# EAGLE board Proiect TSC v45 (EAGLE 9.7.0), part 1 of 2
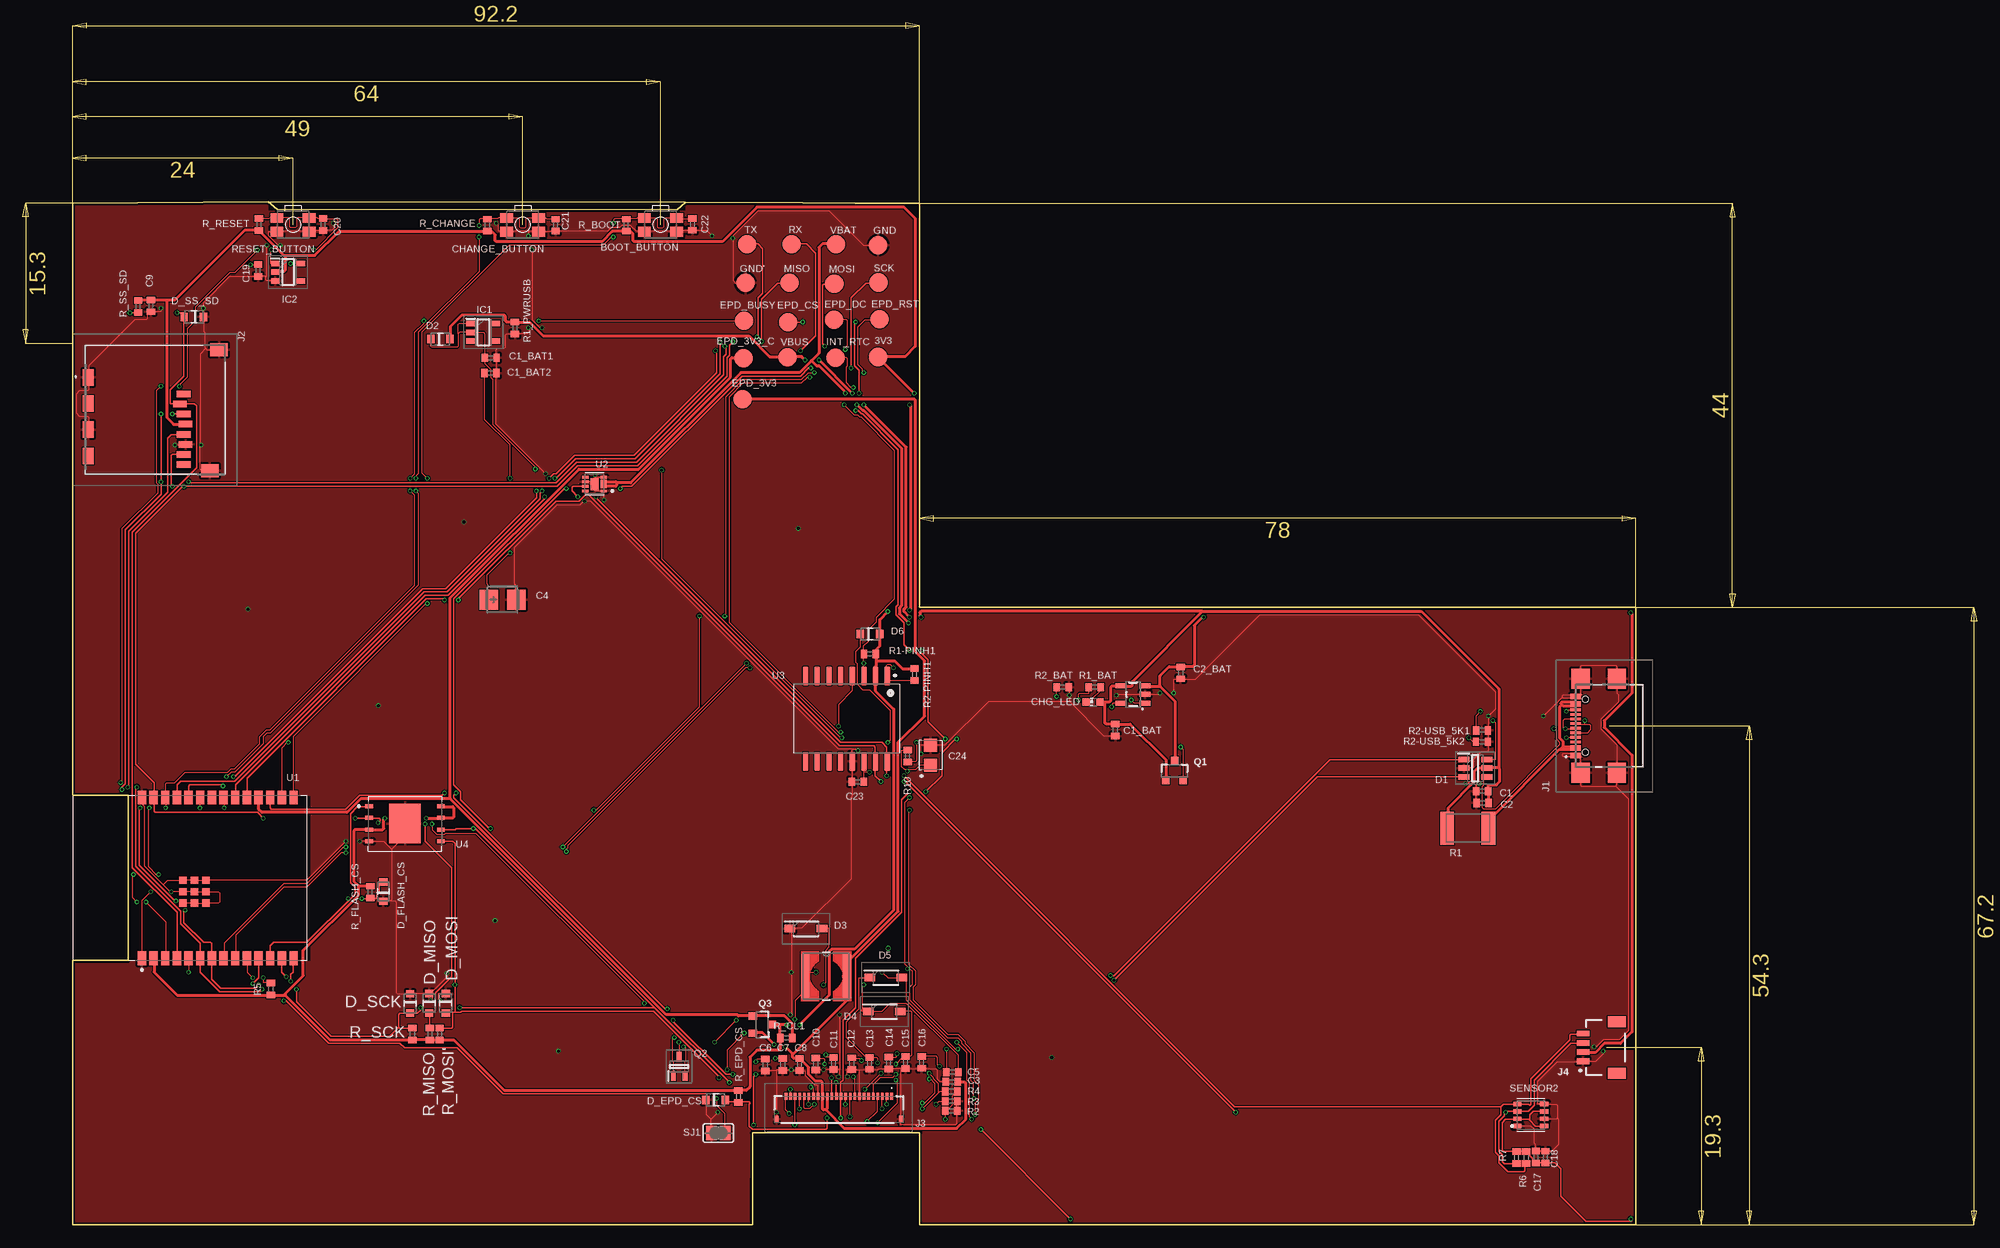
[diagram p0: board, top side]
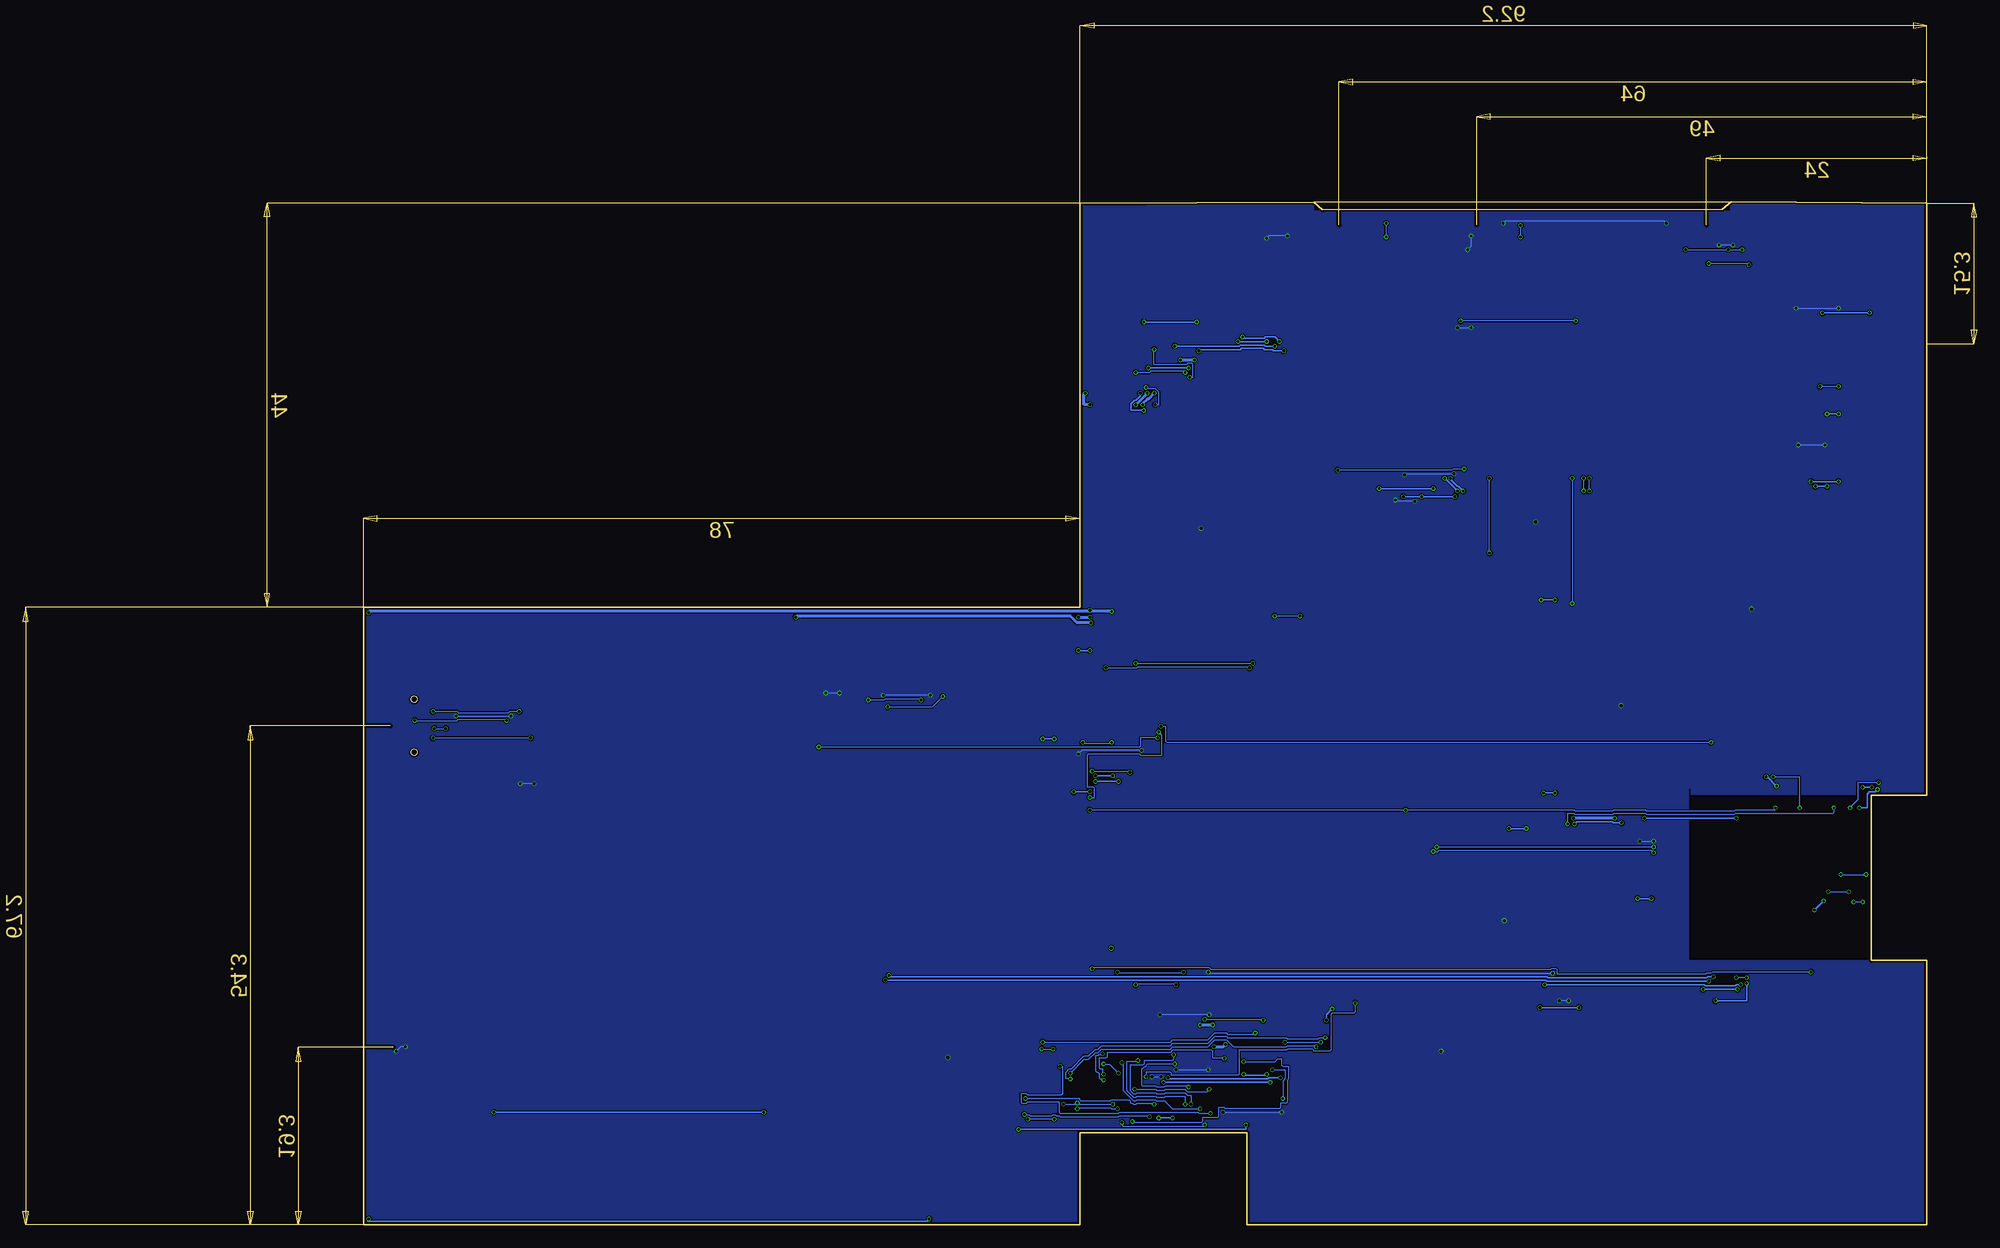
[diagram p1: board, bottom side, seen from below]

Size 212.67 x 130.8 mm. Coordinates in mm from the lower left corner, seen from the top.
Outline: 26.72,111.34 5.4,111.2 5.4,46.76 11.45,46.76 11.45,28.77 5.4,28.77 5.4,0 79.4,0 79.4,10 97.6,10 97.6,0 175.6,0 175.6,67.2 97.6,67.2 97.6,111.2 72.13,111.28
Outline: 26.72,111.34 72.13,111.28
Outline: 26.72,111.34 27.66,110.53 71.19,110.47 72.13,111.28
Copper layers (1*16): Top 0.035mm / dielectric 1.6mm / Bottom 0.035mm
Design rules "jlcpcb-2layers.edru *": minimum track width 5mil, minimum drill 0.3mm, track to track 5mil, track to pad 5mil, pad to pad 5mil, via to via 5mil, smd to smd 5mil, copper to edge 0.2mm, drill to drill 6mil, minimum pad ring 10mil, minimum via ring 3mil, stop-mask expansion 4mil, vias tented up to drill 0mil, thermal gap 10mil
Net classes: 1 power: width 0.3 mm; 2 data: width 0.15 mm

## Footprints (pad centres in the part's own frame; a part is rotated, then mirrored left to right if it is on the bottom)
TP20R = smd 2 x 2: TP 0,0
MYBUTTON = smd 1.4 x 1.05: 1 1.75,0.75; 2 -1.75,0.75; 3 -1.75,-0.75; 4 1.75,-0.75
EAGLE-LTSPICE_C0402 = smd 0.7 x 0.9: 1 -0.65,0; 2 0.65,0
RCL_CT3528 = smd 2 x 2.2: + -1.5,0; - 1.5,0
CAPCP3225X100N = smd 1.4 x 1.4: 1 -1.1,0; 2 1.1,0
ADAFRUIT_CHIP-LED0603 = smd 0.8 x 0.8: A 0,-0.75; C 0,0.75
SOT95P280X145-6N = smd 1.2 x 0.6: 1 -1.25,0.95; 2 -1.25,0; 3 -1.25,-0.95; 4 1.25,-0.95; 5 1.25,0; 6 1.25,0.95
ESP32_WROVER_AVX---SD0805S020S1R0_AVX_SD0805S020S1R0_0 = smd 0.8 x 0.9: 1 -1.05,0; 2 1.05,0
SOD3716X135N = smd 1.15 x 0.8: 1 -1.75,0; 2 1.75,0
SOT95P280X125-5N = smd 0.9 x 0.6: 1 -1.4,0.95; 2 -1.4,0; 3 -1.4,-0.95; 4 1.4,-0.95; 5 1.4,0.95
SAMACSYS_PARTS_USB4110GFA = smd 0.3 x 1.15: A1 -3.35,3.678; A4 -2.55,3.678; A5 -1.25,3.678; A6 -0.25,3.678; A7 0.25,3.678; A8 1.25,3.678; A9 2.55,3.678; A12 3.35,3.678; B1 3.05,3.678; B4 2.25,3.678; B5 1.75,3.678; B6 0.75,3.678; B7 -0.75,3.678; B8 -1.75,3.678; B9 -2.25,3.678; B12 -3.05,3.678 | smd 2.18 x 2: MP1 -5.11,-0.827; MP2 5.11,-0.827; MP3 -5.11,3.103; MP4 5.11,3.103 | hole 0.65: -2.89,2.603; 2.89,2.603
112ATAARR03ATTEND = smd 1.8 x 1.2: G1 10.6,10.4; G2 4.9,10.4; S1 7.75,10.4; S2 2.05,10.4 | smd 1.4 x 1.9: G3 13.6,-3.85; G4 0.45,-2.85 | smd 0.7 x 1.5: P1 8.8,0; P2 7.7,0.4; P3 6.6,0; P4 5.5,-0.2; P5 4.4,0; P6 3.3,-0.2; P7 2.2,0; P8 1.1,0
FH34SRJ24S05SH99 = smd 0.3 x 0.8: 1 5.75,1.45; 2 5.25,1.45; 3 4.75,1.45; 4 4.25,1.45; 5 3.75,1.45; 6 3.25,1.45; 7 2.75,1.45; 8 2.25,1.45; 9 1.75,1.45; 10 1.25,1.45; 11 0.75,1.45; 12 0.25,1.45; 13 -0.25,1.45; 14 -0.75,1.45; 15 -1.25,1.45; 16 -1.75,1.45; 17 -2.25,1.45; 18 -2.75,1.45; 19 -3.25,1.45; 20 -3.75,1.45; 21 -4.25,1.45; 22 -4.75,1.45; 23 -5.25,1.45; 24 -5.75,1.45 | smd 0.4 x 0.8: MP1 6.75,-1.05; MP2 -6.75,-1.05
JST04_1MM_RA = smd 0.6 x 1.35: 1 -1.5,0; 2 -0.5,0; 3 0.5,0; 4 1.5,0 | smd 1.2 x 2: NC1 2.8,-3.675; NC2 -2.8,-3.675
IND_4828-WE-TPC_WRE = smd 0.889 x 4.826: 1 -2.286,0; 2 2.286,0
ESP32_WROVER_SPARKFUN-IC-POWER_SOT23-5 = smd 0.55 x 1.2: 1 -0.95,-1.3; 2 0,-1.3; 3 0.95,-1.3; 4 0.95,1.3; 5 -0.95,1.3
ESP32_WROVER_SPARKFUN-DISCRETESEMI_SOT23-3 = smd 0.8 x 0.9: 1 -0.95,-1; 2 0.95,-1; 3 0,1.1
SOT65P210X110-3N = smd 1.05 x 0.5: 1 -1.05,0.65; 2 -1.05,-0.65; 3 1.05,0
ESP32C6_VARISTOR_CT/CN1812 = smd 1.5 x 3.6: 1 -2.25,0; 2 2.25,0
ESP32_WROVER_BME680_PSON80P300X300X100-8N = smd 1.016 x 0.5: 1 1.458,1.2; 2 1.458,0.4; 3 1.458,-0.4; 4 1.458,-1.2; 5 -1.458,-1.22; 6 -1.458,-0.4; 7 -1.458,0.4; 8 -1.458,1.2
SJ = smd 1.168 x 1.6: 1 -0.762,0; 2 0.762,0
XCVR_ESP32-C6-WROOM-1-N8 = smd 1.5 x 0.9: 1 -8.75,5.26; 2 -8.75,3.99; 3 -8.75,2.72; 4 -8.75,1.45; 5 -8.75,0.18; 6 -8.75,-1.09; 7 -8.75,-2.36; 8 -8.75,-3.63; 9 -8.75,-4.9; 10 -8.75,-6.17; 11 -8.75,-7.44; 12 -8.75,-8.71; 13 -8.75,-9.98; 14 -8.75,-11.25; 15 8.75,-11.25; 16 8.75,-9.98; 17 8.75,-8.71; 18 8.75,-7.44; 19 8.75,-6.17; 20 8.75,-4.9; 21 8.75,-3.63; 22 8.75,-2.36; 23 8.75,-1.09; 24 8.75,0.18; 25 8.75,1.45; 26 8.75,2.72; 27 8.75,3.99; 28 8.75,5.26 | smd 0.8 x 0.8: 29_1 -2.755,0.79; 29_2 -1.505,0.79; 29_3 -0.255,0.79; 29_4 -2.755,-0.46; 29_5 -1.505,-0.46; 29_6 -0.255,-0.46; 29_7 -2.755,-1.71; 29_8 -1.505,-1.71; 29_9 -0.255,-1.71
SON50P200X200X80-9N = smd 0.76 x 0.27: 1 -0.985,0.75; 4 -0.985,-0.75; 5 0.985,-0.75; 6 0.985,-0.25; 7 0.985,0.25; 8 0.985,0.75 | smd 0.76 x 0.397: 2 -0.985,0.25; 3 -0.985,-0.25 | smd 0.9 x 1.3: 9 0,0
SOIC127P1032X265-16N = smd 2.05 x 0.59: 1 -4.655,4.445; 2 -4.655,3.175; 3 -4.655,1.905; 4 -4.655,0.635; 5 -4.655,-0.635; 6 -4.655,-1.905; 7 -4.655,-3.175; 8 -4.655,-4.445; 9 4.655,-4.445; 10 4.655,-3.175; 11 4.655,-1.905; 12 4.655,-0.635; 13 4.655,0.635; 14 4.655,1.905; 15 4.655,3.175; 16 4.655,4.445
SON127P600X800X80-9N = smd 0.94 x 0.44: 1 -3.895,1.905; 2 -3.895,0.635; 3 -3.895,-0.635; 4 -3.895,-1.905; 5 3.895,-1.905; 6 3.895,-0.635; 7 3.895,0.635; 8 3.895,1.905 | smd 3.4 x 4.3: 9 0,0

## Placement (x,y rotation side)
3V3  TPTP20R  [TP20R]  93.08,94.45 0 top
BOOT_BUTTON  BUTTON_CUSYOMV1  [MYBUTTON]  69.4,108.83 180 top
C1  100nF  [EAGLE-LTSPICE_C0402]  158.85,47.18 180 top
C1_BAT  4.7uF  [EAGLE-LTSPICE_C0402]  118.91,53.84 270 top
C1_BAT1  4.7uF  [EAGLE-LTSPICE_C0402]  50.91,94.35 0 top
C1_BAT2  4.7uF  [EAGLE-LTSPICE_C0402]  50.9,92.7 0 top
C2  4.7uF  [EAGLE-LTSPICE_C0402]  158.88,45.91 180 top
C2_BAT  4.7uF  [EAGLE-LTSPICE_C0402]  126.03,60.08 270 top
C3  10uF  [EAGLE-LTSPICE_C0402]  101.09,15.56 180 top
C4  100uF  [RCL_CT3528]  52.21,68.04 0 top
C5  4.7uF/25V  [EAGLE-LTSPICE_C0402]  101.15,16.61 180 top
C6  1uF/50V  [EAGLE-LTSPICE_C0402]  80.81,17.4 90 top
C7  1uF/50V  [EAGLE-LTSPICE_C0402]  82.71,17.46 90 top
C8  1uF/50V  [EAGLE-LTSPICE_C0402]  84.55,17.45 90 top
C9  100nF  [EAGLE-LTSPICE_C0402]  13.93,100.02 270 top
C10  1uF/50V  [EAGLE-LTSPICE_C0402]  86.31,17.51 90 top
C11  1uF/50V  [EAGLE-LTSPICE_C0402]  88.23,17.57 90 top
C12  1uF/50V  [EAGLE-LTSPICE_C0402]  90.22,17.53 90 top
C13  1uF/50V  [EAGLE-LTSPICE_C0402]  92.15,17.58 90 top
C14  1uF/50V  [EAGLE-LTSPICE_C0402]  94.24,17.59 90 top
C15  1uF/50V  [EAGLE-LTSPICE_C0402]  96.07,17.68 90 top
C16  1uF/50V  [EAGLE-LTSPICE_C0402]  97.84,17.69 90 top
C17  100nF  [EAGLE-LTSPICE_C0402]  164.69,7.36 90 top
C18  100nF  [EAGLE-LTSPICE_C0402]  165.74,7.36 90 top
C19  100nF  [EAGLE-LTSPICE_C0402]  25.61,103.86 270 top
C20  1uF  [EAGLE-LTSPICE_C0402]  32.67,108.86 270 top
C21  100uF  [EAGLE-LTSPICE_C0402]  57.99,108.79 270 top
C22  100uF  [EAGLE-LTSPICE_C0402]  72.88,108.89 270 top
C23  100nF  [EAGLE-LTSPICE_C0402]  90.89,48.22 180 top
C24  CPH3225A  [CAPCP3225X100N]  98.81,51.11 90 top
CHANGE_BUTTON  BUTTON_CUSYOMV1  [MYBUTTON]  54.4,108.83 180 top
CHG_LED  [ADAFRUIT_CHIP-LED0603]  116.5,56.91 90 top
D1  USBLC6-2SC6Y  [SOT95P280X145-6N]  158.09,49.7 0 top
D2  ESP32_WROVER_AVX---SD0805S020S1R0_AVX_SD0805S020S1R0_0_0AVX_SD0805S020S1R0_0_0  [ESP32_WROVER_AVX---SD0805S020S1R0_AVX_SD0805S020S1R0_0]  45.44,96.4 0 top
D3  MBR0530  [SOD3716X135N]  85.24,32.23 0 top
D4  MBR0530  [SOD3716X135N]  93.76,23.2 0 top
D5  MBR0530  [SOD3716X135N]  93.93,26.9 0 top
D6  ESP32_WROVER_AVX---SD0805S020S1R0_AVX_SD0805S020S1R0_0_0AVX_SD0805S020S1R0_0_0  [ESP32_WROVER_AVX---SD0805S020S1R0_AVX_SD0805S020S1R0_0]  92.21,64.3 0 top
D_EPD_CS  PGB1010603MR  [ESP32_WROVER_AVX---SD0805S020S1R0_AVX_SD0805S020S1R0_0]  75.4,13.59 0 top
D_FLASH_CS  PGB1010603MR  [ESP32_WROVER_AVX---SD0805S020S1R0_AVX_SD0805S020S1R0_0]  39.23,36.26 90 top
D_MISO  PGB1010603MR  [ESP32_WROVER_AVX---SD0805S020S1R0_AVX_SD0805S020S1R0_0]  44.23,24.12 270 top
D_MOSI  PGB1010603MR  [ESP32_WROVER_AVX---SD0805S020S1R0_AVX_SD0805S020S1R0_0]  46.03,24.12 270 top
D_SCK  PGB1010603MR  [ESP32_WROVER_AVX---SD0805S020S1R0_AVX_SD0805S020S1R0_0]  42.14,24.09 270 top
D_SS_SD  PGB1010603MR  [ESP32_WROVER_AVX---SD0805S020S1R0_AVX_SD0805S020S1R0_0]  18.61,98.81 180 top
EPD_3V3  TPTP20R  [TP20R]  78.34,89.86 0 top
EPD_3V3_C  TPTP20R  [TP20R]  78.46,94.32 0 top
EPD_BUSY  TPTP20R  [TP20R]  78.52,98.39 0 top
EPD_CS  TPTP20R  [TP20R]  83.28,98.2 0 top
EPD_DC  TPTP20R  [TP20R]  88.32,98.47 0 top
EPD_RST  TPTP20R  [TP20R]  93.23,98.56 0 top
GND  TPTP20R  [TP20R]  93.11,106.61 0 top
GND'  TPTP20R  [TP20R]  78.65,102.53 0 top
IC1  XC6220A331MR-G  [SOT95P280X125-5N]  50.12,97.13 0 top
IC2  BD5229G-TR  [SOT95P280X125-5N]  28.85,103.69 0 top
INT_RTC  TPTP20R  [TP20R]  88.45,94.39 0 top
J1  SAMACSYS_PARTS_USB4110-GF-A  [SAMACSYS_PARTS_USB4110GFA]  172.68,54.3 90 top
J2  112A-TAAR-R03_ATTEND  [112ATAARR03ATTEND]  17.49,81.63 90 top
J3  FH34SRJ-24S-0.5SH_99_  [FH34SRJ24S05SH99]  88.81,12.54 0 top
J4  QWIIC_RIGHT_ANGLE  [JST04_1MM_RA]  169.83,19.3 90 top
L1  68Uh  [IND_4828-WE-TPC_WRE]  87.43,27.05 0 top
MCP73831  ESP32_WROVER_SPARKFUN-IC-POWER_MCP73831  [ESP32_WROVER_SPARKFUN-IC-POWER_SOT23-5]  120.85,57.73 90 top
MISO  TPTP20R  [TP20R]  83.46,102.51 0 top
MOSI  TPTP20R  [TP20R]  88.32,102.42 0 top
Q1  20V/4.2A/52mΩ/1.4W  [ESP32_WROVER_SPARKFUN-DISCRETESEMI_SOT23-3]  125.36,49.38 0 top
Q2  SI1308EDL-T1-GE3  [SOT65P210X110-3N]  71.43,17.24 90 top
Q3  20V/4.2A/52mΩ/1.4W  [ESP32_WROVER_SPARKFUN-DISCRETESEMI_SOT23-3]  80.44,21.79 270 top
R1  ESP32C6_VARISTORCN1812  [ESP32C6_VARISTOR_CT/CN1812]  157.29,43.16 180 top
R1-PINH1  10K  [EAGLE-LTSPICE_C0402]  92.21,62.13 0 top
R1_BAT  200  [EAGLE-LTSPICE_C0402]  116.66,58.51 180 top
R1_PWRUSB  100K  [EAGLE-LTSPICE_C0402]  53.56,97.61 90 top
R2  2.2  [EAGLE-LTSPICE_C0402]  101.05,12.4 180 top
R2-PINH1  10K  [EAGLE-LTSPICE_C0402]  97.06,59.91 90 top
R2-USB_5K1  5k1  [EAGLE-LTSPICE_C0402]  158.82,53.81 0 top
R2-USB_5K2  5k1  [EAGLE-LTSPICE_C0402]  158.82,52.57 180 top
R2_BAT  2K  [EAGLE-LTSPICE_C0402]  113.2,58.51 180 top
R3  10K  [EAGLE-LTSPICE_C0402]  101.08,13.46 180 top
R4  0.47  [EAGLE-LTSPICE_C0402]  101.07,14.51 180 top
R5  10K  [EAGLE-LTSPICE_C0402]  27,25.67 270 top
R6  10K  [EAGLE-LTSPICE_C0402]  163.64,7.33 90 top
R7  10K  [EAGLE-LTSPICE_C0402]  162.59,7.32 90 top
R10  15  [EAGLE-LTSPICE_C0402]  96.31,51.01 90 top
R_BOOT  10k  [EAGLE-LTSPICE_C0402]  65.67,108.79 270 top
R_CHANGE  10k  [EAGLE-LTSPICE_C0402]  50.56,108.79 270 top
R_CL1  10K  [EAGLE-LTSPICE_C0402]  83.09,20.34 180 top
R_EPD_CS  10k  [EAGLE-LTSPICE_C0402]  77.88,13.97 90 top
R_FLASH_CS  10k  [EAGLE-LTSPICE_C0402]  37.82,36.2 90 top
R_MISO  10k  [EAGLE-LTSPICE_C0402]  44.31,20.76 270 top
R_MOSI'  10k  [EAGLE-LTSPICE_C0402]  45.36,20.75 270 top
R_RESET  10k  [EAGLE-LTSPICE_C0402]  25.7,108.86 270 top
R_SCK  10k  [EAGLE-LTSPICE_C0402]  42.4,20.76 270 top
R_SS_SD  10k  [EAGLE-LTSPICE_C0402]  12.53,99.94 90 top
RESET_BUTTON  BUTTON_CUSYOMV1  [MYBUTTON]  29.4,108.83 180 top
RX  TPTP20R  [TP20R]  83.68,106.72 0 top
SCK  TPTP20R  [TP20R]  93.14,102.55 0 top
SENSOR2  ESP32_WROVER_BME680_BME680  [ESP32_WROVER_BME680_PSON80P300X300X100-8N]  164.14,11.94 180 top
SJ1  [SJ]  75.7,9.98 0 top
TX  TPTP20R  [TP20R]  78.81,106.69 0 top
U1  ESP32-C6-WROOM-1-N8  [XCVR_ESP32-C6-WROOM-1-N8]  18.21,37.76 90 top
U2  MAX17048G+T10  [SON50P200X200X80-9N]  62.22,80.62 180 top
U3  DS3231SN#  [SOIC127P1032X265-16N]  89.64,55.08 270 top
U4  W25Q512JVEIQ  [SON127P600X800X80-9N]  41.58,43.65 0 top
VBAT  TPTP20R  [TP20R]  88.53,106.71 0 top
VBUS  TPTP20R  [TP20R]  83.24,94.44 0 top

## Library data of the parts
3V3 BOOT_BUTTON CHANGE_BUTTON CHG_LED EPD_3V3 EPD_3V3_C EPD_BUSY EPD_CS EPD_DC EPD_RST GND GND' INT_RTC MISO MOSI R1 RESET_BUTTON RX SCK SJ1 TX VBAT VBUS = DeskAssistant v19 v1
C1 C1_BAT C1_BAT1 C1_BAT2 C2 C2_BAT C3 C5-C23 = DeskAssistant v19 v1; SPICEMODEL: NONE; SPICEPREFIX: C
C4 = DeskAssistant v19 v1; SPICEPREFIX: C
C24 = DeskAssistant v19 v1; AVAILABILITY: Not in stock; CHECK_PRICES: https://www.snapeda.com/parts/CPH3225A/Seiko+Instruments/view-part/?ref=eda; DESCRIPTION: 11 mF (EDLC) Supercapacitor 3.3 V 1210 (3225 Metric) - -; MF: Seiko Instruments; MP: CPH3225A; PACKAGE: 1210 Seiko; PRICE: None; PURCHASE-URL: https://www.snapeda.com/api/url_track_click_mouser/?unipart_id=562593&manufacturer=Seiko Instruments&part_name=CPH3225A&search_term=None; SNAPEDA_LINK: https://www.snapeda.com/parts/CPH3225A/Seiko+Instruments/view-part/?ref=snap
D1 = DeskAssistant v19 v1; AVAILABILITY: In Stock; CHECK_PRICES: https://www.snapeda.com/parts/USBLC6-2SC6Y/STMicroelectronics/view-part/?ref=eda; DESCRIPTION: 17V Clamp 5A (8/20µs) Ipp Tvs Diode Surface Mount SOT-23-6; MF: STMicroelectronics; MP: USBLC6-2SC6Y; PACKAGE: SOT-23-6 STMicroelectronics; PRICE: None; SNAPEDA_LINK: https://www.snapeda.com/parts/USBLC6-2SC6Y/STMicroelectronics/view-part/?ref=snap
D2 D6 = DeskAssistant v19 v1; CENTROID_NOT_SPECIFIED: No; DATASHEET: http://datasheets.avx.com/schottky.pdf; DIGIKEY_DESCRIPTION: DIODE SCHOTTKY 20V 1A 0805; DIGIKEY_PART_NUMBER: 478-7800-1-ND; LEAD_FREE: yes; MF: AVX; MOUSER_PART_NUMBER: 581-SD0805S020S1R0; PACKAGE: 0805 (2012 metric); PREFIX: D; ROHS: yes; TEMPERATURE_RANGE_HIGH: +125°C; TEMPERATURE_RANGE_LOW: -55°C
D3-D5 = DeskAssistant v19 v1; AVAILABILITY: In Stock; CHECK_PRICES: https://www.snapeda.com/parts/MBR0530/Onsemi/view-part/?ref=eda; DESCRIPTION: Diode Schottky 30 V 500mA Surface Mount SOD-123; MF: ON Semiconductor; MP: MBR0530; PACKAGE: SOD-123-2 ON Semiconductor; PRICE: None; PURCHASE-URL: https://www.snapeda.com/api/url_track_click_mouser/?unipart_id=179458&manufacturer=ON Semiconductor&part_name=MBR0530&search_term=None; SNAPEDA_LINK: https://www.snapeda.com/parts/MBR0530/Onsemi/view-part/?ref=snap
D_EPD_CS D_FLASH_CS D_MISO D_MOSI D_SCK D_SS_SD = DeskAssistant v19 v1; AVAILABILITY: In Stock; CHECK_PRICES: https://www.snapeda.com/parts/PGB1010603MR/Littelfuse/view-part/?ref=eda; DESCRIPTION: 150V (Typ) Clamp - Ipp Tvs Diode Surface Mount 0603 (1608 Metric); MF: Littelfuse Inc.; MP: PGB1010603MR; PACKAGE: 0603 Littelfuse Inc.; PRICE: None; PURCHASE-URL: https://www.snapeda.com/api/url_track_click_mouser/?unipart_id=5659453&manufacturer=Littelfuse Inc.&part_name=PGB1010603MR&search_term=None; SNAPEDA_LINK: https://www.snapeda.com/parts/PGB1010603MR/Littelfuse/view-part/?ref=snap
IC1 = DeskAssistant v19 v1; DESCRIPTION: LDO Voltage Regulators; HEIGHT: 1.2mm; MANUFACTURER_NAME: Torex; MANUFACTURER_PART_NUMBER: XC6220A331MR-G; MOUSER_PART_NUMBER: 865-XC6220A331MR-G; MOUSER_PRICE-STOCK: https://www.mouser.co.uk/ProductDetail/Torex-Semiconductor/XC6220A331MR-G?qs=AsjdqWjXhJ8ZSWznL1J0gg%3D%3D
IC2 = DeskAssistant v19 v1; DESCRIPTION: Voltage Detector with Adjustable Delay Time: CMOS processes are utilized to develop high precision, low current consumption CMOS reset ICs that allow arbitrary setting of the delay time. The extensive lineup includes both Nch Open Drain and CMOS output types in a wide range of detection voltages (from 2.3V to 6.0V, in 0.1V steps), enabling selection of the ideal solution based on customer requirements. In addition, the entire series is of course both lead-free and RoHS-compliant.; HEIGHT: 1.25mm; MANUFACTURER_NAME: ROHM Semiconductor; MANUFACTURER_PART_NUMBER: BD5229G-TR; MOUSER_PART_NUMBER: 755-BD5229G-TR; MOUSER_PRICE-STOCK: https://www.mouser.co.uk/ProductDetail/ROHM-Semiconductor/BD5229G-TR?qs=4kLU8WoGk0vvnhrrYwdszw%3D%3D
J1 = DeskAssistant v19 v1; DESCRIPTION: CONN USB 2.0 TYPE-C R/A SMT; HEIGHT: 3.26mm; MANUFACTURER_NAME: GCT (GLOBAL CONNECTOR TECHNOLOGY); MANUFACTURER_PART_NUMBER: USB4110-GF-A; MOUSER_PART_NUMBER: 640-USB4110-GF-A; MOUSER_PRICE-STOCK: https://www.mouser.co.uk/ProductDetail/GCT/USB4110-GF-A?qs=KUoIvG%2F9IlYiZvIXQjyJeA%3D%3D
J2 = DeskAssistant v19 v1; DESCRIPTION: Micro SD Card Socket, Push-Push Type, Top Mount, SMT, H=1.83mm, 10u; HEIGHT: 1.9mm; MANUFACTURER_NAME: ATTEND; MANUFACTURER_PART_NUMBER: 112A-TAAR-R03 ATTEND
J3 = DeskAssistant v19 v1; DESCRIPTION: 24 Position FFC, FPC Connector Contacts, Top and Bottom 0.020" (0.50mm) Surface Mount, Right Angle; HEIGHT: 1.1mm; MANUFACTURER_NAME: Hirose; MANUFACTURER_PART_NUMBER: FH34SRJ-24S-0.5SH(99); MOUSER_PART_NUMBER: 798-FH34SRJ24S05SH99; MOUSER_PRICE-STOCK: https://www.mouser.co.uk/ProductDetail/Hirose-Connector/FH34SRJ-24S-0.5SH99?qs=vcbW%252B4%252BSTIpKBl5ap9J8Fw%3D%3D
J4 = DeskAssistant v19 v1; PROD_ID: CONN-13694
L1 = DeskAssistant v19 v1; COPYRIGHT: Copyright (C) 2024 Ultra Librarian. All rights reserved.; MANUFACTURER_PART_NUMBER: 744043680; MFR_NAME: Wurth Electronics
MCP73831 = DeskAssistant v19 v1; PROD_ID: IC-09995
Q1 Q3 = DeskAssistant v19 v1; PROD_ID: TRAN-14388
Q2 = DeskAssistant v19 v1; AVAILABILITY: In Stock; CHECK_PRICES: https://www.snapeda.com/parts/SI1308EDL-T1-GE3/Vishay+Siliconix/view-part/?ref=eda; DESCRIPTION: Si1308EDL-T1-GE3 N-channel MOSFET Transistor, 1.5 A, 30 V, 3-Pin SC-70 | Siliconix / Vishay SI1308EDL-T1-GE3; MF: Vishay Siliconix; MP: SI1308EDL-T1-GE3; PACKAGE: SOT-323 Vishay Semiconductor; PRICE: None; PURCHASE-URL: https://www.snapeda.com/api/url_track_click_mouser/?unipart_id=274603&manufacturer=Vishay Siliconix&part_name=SI1308EDL-T1-GE3&search_term=None; SNAPEDA_LINK: https://www.snapeda.com/parts/SI1308EDL-T1-GE3/Vishay+Siliconix/view-part/?ref=snap
R1-PINH1 R1_BAT R1_PWRUSB R2 R2-PINH1 R2-USB_5K1 R2-USB_5K2 R2_BAT R3-R7 R10 R_BOOT R_CHANGE R_CL1 R_EPD_CS R_FLASH_CS R_MISO R_MOSI' R_RESET R_SCK R_SS_SD = DeskAssistant v19 v1; SPICEMODEL: NONE; SPICEPREFIX: R
SENSOR2 = DeskAssistant v19 v1; AVAILABILITY: Unavailable; DESCRIPTION: Integrated Environmental Unit; MF: Bosch Sensortec; MP: BME680; PACKAGE: LGA-8 Bosch Tools; PRICE: None
U1 = DeskAssistant v19 v1; AVAILABILITY: In Stock; CHECK_PRICES: https://www.snapeda.com/parts/ESP32-C6-WROOM-1-N8/Espressif+Systems/view-part/?ref=eda; DESCRIPTION: Multiprotocol Modules ESP32-C6 module, Wi-Fi 6 in 2.4 GHz band, Bluetooth 5, Zigbee 3.0 and Thread. ESP34-WROOM Compatible - ENGINEERING SAMPLE; MF: Espressif Systems; MP: ESP32-C6-WROOM-1-N8; PACKAGE: None; PRICE: None; SNAPEDA_LINK: https://www.snapeda.com/parts/ESP32-C6-WROOM-1-N8/Espressif+Systems/view-part/?ref=snap
U2 = DeskAssistant v19 v1; AVAILABILITY: In Stock; CHECK_PRICES: https://www.snapeda.com/parts/MAX17048G+T10/Analog+Devices/view-part/?ref=eda; DESCRIPTION: 3µA 1-Cell/2-Cell Fuel Gauge with ModelGauge; MF: Analog Devices; MP: MAX17048G+T10; PACKAGE: TDFN-8 Maxim; PRICE: None; PURCHASE-URL: https://www.snapeda.com/api/url_track_click_mouser/?unipart_id=329239&manufacturer=Analog Devices&part_name=MAX17048G+T10&search_term=None; SNAPEDA_LINK: https://www.snapeda.com/parts/MAX17048G+T10/Analog+Devices/view-part/?ref=snap
U3 = DeskAssistant v19 v1; AVAILABILITY: In Stock; CHECK_PRICES: https://www.snapeda.com/parts/DS3231SN%23/Analog+Devices/view-part/?ref=eda; DESCRIPTION: Extremely Accurate I²C-Integrated RTC/TCXO/Crystal; MF: Analog Devices; MP: DS3231SN#; PACKAGE: SOIC-16 Maxim; PRICE: None; PURCHASE-URL: https://www.snapeda.com/api/url_track_click_mouser/?unipart_id=99048&manufacturer=Analog Devices&part_name=DS3231SN#&search_term=None; SNAPEDA_LINK: https://www.snapeda.com/parts/DS3231SN%23/Analog+Devices/view-part/?ref=snap
U4 = DeskAssistant v19 v1; AVAILABILITY: In Stock; CHECK_PRICES: https://www.snapeda.com/parts/W25Q512JVEIQ/Winbond+Electronics/view-part/?ref=eda; DESCRIPTION: FLASH - NOR Memory IC 512Mb (64M x 8) SPI - Quad I/O 133 MHz 8-WSON (8x6); MF: Winbond Electronics; MP: W25Q512JVEIQ; PACKAGE: Package; PRICE: None; SNAPEDA_LINK: https://www.snapeda.com/parts/W25Q512JVEIQ/Winbond+Electronics/view-part/?ref=snap

## Nets
3V3 [power]: 3V3.TP C9.1 D6.2 IC2.2 J2.P4 J4.2 Q3.3 R1-PINH1.2 R2-PINH1.2 R5.2 R_BOOT.2 R_CHANGE.2 R_CL1.2 R_EPD_CS.2 R_FLASH_CS.2 R_MISO.2 R_MOSI'.2 R_RESET.2 R_SCK.2 R_SS_SD.2 U1.2 U3.2 U4.3 U4.7 U4.8
32KHZ: R2-PINH1.1 U1.9 U3.1
DN: D1.6 J1.A7 J1.B7
DP: D1.4 J1.A6 J1.B6
EPD_3V3 [power]: C3.1 C8.2 EPD_3V3.TP J3.15 J3.16 L1.2 Q3.2
EPD_3V3_C [power]: EPD_3V3_C.TP Q3.1 R_CL1.1 U1.18
EPD_BUSY: EPD_BUSY.TP J3.9 U1.26
EPD_CS [data]: D_EPD_CS.2 EPD_CS.TP J3.12 R_EPD_CS.1 U1.11
EPD_DC: EPD_DC.TP J3.11 U1.5
EPD_RST: EPD_RST.TP J3.10 U1.21
FLASH_CS [data]: D_FLASH_CS.2 R_FLASH_CS.1 U1.12 U4.1
GDR: J3.2 Q2.1 R3.2
GND: BOOT_BUTTON.1 BOOT_BUTTON.2 C1.2 C1_BAT1.2 C1_BAT2.2 C1_BAT.2 C2.2 C2_BAT.2 C3.2 C4.- C6.1 C7.1 C8.1 C9.2 C10.1 C11.1 C12.1 C13.1 C14.1 C15.1 C16.1 C17.2 C18.2 C19.2 C20.2 C21.2 C22.2 C23.2 C24.2 CHANGE_BUTTON.1 CHANGE_BUTTON.2 D1.2 D3.1 D_EPD_CS.1 D_FLASH_CS.1 D_MISO.1 D_MOSI.1 D_SCK.1 D_SS_SD.1 GND'.TP GND.TP IC2.3 J1.A1 J1.A12 J1.B1 J1.B12 J1.MP1 J1.MP2 J1.MP3 J1.MP4 J2.G1 J2.G2 J2.G3 J2.G4 J2.P6 J3.8 J3.17 J3.MP1 J3.MP2 J4.1 MCP73831.2 R1_PWRUSB.1 R2-USB_5K1.2 R2-USB_5K2.1 R2.1 R2_BAT.1 R3.1 RESET_BUTTON.1 RESET_BUTTON.2 SENSOR2.1 SENSOR2.5 SENSOR2.7 SJ1.1 U1.1 U1.28 U1.29_1 U1.29_2 U1.29_3 U1.29_4 U1.29_5 U1.29_6 U1.29_7 U1.29_8 U1.29_9 U2.1 U2.4 U2.6 U2.9 U3.13 U4.4 U4.9
GPIO8: R5.1 U1.10
I2C_PW [data]: C17.1 C18.1 R6.2 R7.2 SENSOR2.2 SENSOR2.6 SENSOR2.8 U1.17
INT_RTC: INT_RTC.TP R1-PINH1.1 U1.8 U3.3
IO/BOOT: BOOT_BUTTON.3 BOOT_BUTTON.4 C22.1 R_BOOT.1 U1.15
IO/CHANGE: C21.1 CHANGE_BUTTON.3 CHANGE_BUTTON.4 R_CHANGE.1 U1.23
MISO [data]: D_MISO.2 J2.P7 MISO.TP R_MISO.1 U1.27 U4.2
MOSI [data]: D_MOSI.2 J2.P3 J3.14 MOSI.TP R_MOSI'.1 U1.7 U4.5
N$1: C5.1 D3.2 D4.1
N$2: CHG_LED.C R1_BAT.1
N$3: J1.B5 R2-USB_5K1.1
N$4: MCP73831.1 R1_BAT.2
N$6: MCP73831.5 R2_BAT.2
N$7: C6.2 J3.4
N$8: C19.1 IC2.5
N$9: J1.A5 R2-USB_5K2.2
N$10: D6.1 R10.1
N$11: C7.2 J3.5
N$13: C10.2 J3.18
N$14: C1_BAT1.1 D2.1 IC1.1 IC1.2 Q1.2
N$15: C11.2 J3.19
N$16: C12.2 J3.20
N$17: C1_BAT2.1 C4.+
N$18: C14.2 J3.22
N$19: C16.2 J3.24
PREVGH: C13.2 D5.1 J3.21
PREVGL: C15.2 D4.2 J3.23
RESE: J3.3 Q2.2 R4.2
RESE': R2.2 R4.1 SJ1.2
RESET: C20.1 IC2.1 R_RESET.1 RESET_BUTTON.3 RESET_BUTTON.4 U1.3
RTC_RST: U1.16 U3.4
RX [data]: RX.TP U1.24
SCK [data]: D_SCK.2 J2.P5 J3.13 R_SCK.1 SCK.TP U1.6 U4.6
SCL [data]: J4.4 R6.1 SENSOR2.4 U1.20 U2.7 U3.16
SDA [data]: J4.3 R7.1 SENSOR2.3 U1.19 U2.8 U3.15
SRC: C5.2 D5.2 L1.1 Q2.3
SS_SD [data]: D_SS_SD.2 J2.P2 R_SS_SD.1 U1.4
TX [data]: TX.TP U1.25
USB_D+ [data]: D1.3 U1.14
USB_D- [data]: D1.1 U1.13
VBAT [power]: C2_BAT.1 MCP73831.3 Q1.3 U2.2 U2.3 VBAT.TP
VBUS [power]: C1.1 C1_BAT.1 C2.1 CHG_LED.A D1.5 D2.2 MCP73831.4 Q1.1 R1.2 R1_PWRUSB.2 VBUS.TP
VRTC: C23.1 C24.1 R10.2 U3.14
VUSB [power]: J1.A4 J1.A9 J1.B4 J1.B9 R1.1